# EAGLE board Dado-Ângelo Teresa 25441 (EAGLE 9.7.0)

Size 259.45 x 72.32 mm. Coordinates in mm from the lower left corner, seen from the top.
Outline: 0,0 259.45,0 259.45,72.32 0,72.32 0,0
Copper layers (1*16): Top 0.035mm / dielectric 1.5mm / Bottom 0.035mm
Design rules "default": minimum track width 6mil, minimum drill 0.35mm, track to track 6mil, track to pad 6mil, pad to pad 6mil, via to via 6mil, smd to smd 6mil, copper to edge 40mil, drill to drill 6mil, minimum pad ring 10mil, minimum via ring 8mil, stop-mask expansion 4mil, vias tented up to drill 0mil, thermal gap 10mil

## Footprints (pad centres in the part's own frame; a part is rotated, then mirrored left to right if it is on the bottom)
LEDRD254W60D565H860B = drill 0.981 pad 1.581: 1 -1.27,0; 2 1.27,0
7SEG-13 = drill 0.813 long: 1 -5.08,-7.62; 2 -2.54,-7.62; 3 0,-7.62; 4 2.54,-7.62; 5 5.08,-7.62; 6 5.08,7.62; 7 2.54,7.62; 8 0,7.62; 9 -2.54,7.62; 10 -5.08,7.62
BATTERY-GENERIC = drill 1.118 pad 3.15 octagon: + 2.54,0; - -2.54,0
RESAD1016W63L850D250B = drill 0.83 pad 1.43: 1 -5.08,0; 2 5.08,0
SWITCH-MOMENTARY-PTH-6.5MM = drill 1.016 pad 1.88: 1 -3.251,2.261; 2 3.251,2.261; 3 -3.251,-2.261; 4 3.251,-2.261
DIP762W53P254L1969H508Q14B = drill 0.743 pad 1.343: 1 -3.81,7.62; 2 -3.81,5.08; 3 -3.81,2.54; 4 -3.81,0; 5 -3.81,-2.54; 6 -3.81,-5.08; 7 -3.81,-7.62; 8 3.81,-7.62; 9 3.81,-5.08; 10 3.81,-2.54; 11 3.81,0; 12 3.81,2.54; 13 3.81,5.08; 14 3.81,7.62
DIP762W53P254L1969H508Q16B = drill 0.743 pad 1.343: 1 -3.81,8.89; 2 -3.81,6.35; 3 -3.81,3.81; 4 -3.81,1.27; 5 -3.81,-1.27; 6 -3.81,-3.81; 7 -3.81,-6.35; 8 -3.81,-8.89; 9 3.81,-8.89; 10 3.81,-6.35; 11 3.81,-3.81; 12 3.81,-1.27; 13 3.81,1.27; 14 3.81,3.81; 15 3.81,6.35; 16 3.81,8.89

## Placement (x,y rotation side)
D1  RED  [LEDRD254W60D565H860B]  33.29,63.45 180 top
DIGIT1  7SEG-CK  [7SEG-13]  176.8,53.29 0 top
FUNC1  FUNCTION-GENERATOR  [BATTERY-GENERIC]  35.47,8.26 0 top
P1  BATTERYGENERIC  [BATTERY-GENERIC]  8.26,43.99 180 top
R2  300  [RESAD1016W63L850D250B]  230.16,55.74 90 top
R3  300  [RESAD1016W63L850D250B]  250.48,40.5 0 top
R4  300  [RESAD1016W63L850D250B]  166.64,65.99 0 top
R5  300  [RESAD1016W63L850D250B]  186.96,65.99 0 top
R6  300  [RESAD1016W63L850D250B]  169.18,63.45 0 top
R7  300  [RESAD1016W63L850D250B]  184.42,63.45 0 top
R8  300  [RESAD1016W63L850D250B]  184.42,43.13 0 top
R9  300  [RESAD1016W63L850D250B]  169.18,43.13 0 top
R10  300  [RESAD1016W63L850D250B]  166.64,40.59 0 top
S1  SWITCH_MOMENTARY  [SWITCH-MOMENTARY-PTH-6.5MM]  214.92,44.31 90 top
U1  74HC10_PDIP  [DIP762W53P254L1969H508Q14B]  237.78,46.85 90 top
U2  74HC10_PDIP  [DIP762W53P254L1969H508Q14B]  100.6,54.56 90 top
U3  74HC73_PDIP  [DIP762W53P254L1969H508Q14B]  44.72,54.56 90 top
U4  CD4511_PDIP  [DIP762W53P254L1969H508Q16B]  129.81,54.56 90 top
U5  74HC73_PDIP  [DIP762W53P254L1969H508Q14B]  72.66,54.56 90 top

## Library data of the parts
D1 = Tinkercad; CATEGORY: Opto-Electronic; SUB-CATEGORY: LED; VALUE: LED_RED
DIGIT1 = Tinkercad; CATEGORY: Opto-Electronic; SUB-CATEGORY: Display; TYPE: 7-Segment
FUNC1 P1 R2-R10 S1 U1-U5 = Tinkercad

## Nets
DIGIT1_A: DIGIT1.7 R7.1
DIGIT1_B: DIGIT1.6 R5.1
DIGIT1_C: DIGIT1.4 R8.1
DIGIT1_D: DIGIT1.2 R9.2
DIGIT1_E: DIGIT1.1 R10.2
DIGIT1_F: DIGIT1.9 R6.2
DIGIT1_G: DIGIT1.10 R4.2
FUNC1+: FUNC1.+ S1.3 S1.4 U1.1 U1.2 U1.13
FUNC1-: D1.2 DIGIT1.3 FUNC1.- P1.- R3.2 S1.1 S1.2 U2.7 U3.11 U4.5 U4.8 U5.11
P1+: P1.+ R2.2 U2.14 U3.2 U3.3 U3.4 U3.14 U4.3 U4.4 U4.16 U5.4
U1_1Y: D1.1 U1.3 U1.12 U3.1 U3.5 U5.1
U1_2C: U1.5 U1.10
U1_2Y: U1.6 U1.9
U1_3C: U1.4 U1.11
U1_3Y: R3.1 U1.7 U1.8
U1_VCC: R2.1 U1.14
U2_1C: U2.1 U2.2 U2.8 U2.13
U2_1Y: U2.12 U5.3 U5.14
U2_3C: U2.3 U2.10 U2.11 U3.9 U4.1
U3_J2: U2.5 U2.9 U3.7 U3.10 U3.12 U4.7
U3_R2: U2.6 U3.6 U5.2
U4_A: R7.2 U4.13
U4_B: R5.2 U4.12
U4_C: R8.2 U4.11
U4_D: R9.1 U4.10
U4_E: R10.1 U4.9
U4_F: R6.1 U4.15
U4_G: R4.1 U4.14
U5_1Q: U2.4 U4.2 U5.12

## Tracks (layer width: path | path; a pad name or v marks a point on that pad's centre or on a via)
DIGIT1_A  (1 unrouted)
DIGIT1_B  (1 unrouted)
DIGIT1_C  (1 unrouted)
DIGIT1_D  (1 unrouted)
DIGIT1_E  (1 unrouted)
DIGIT1_F  (1 unrouted)
DIGIT1_G  (1 unrouted)
FUNC1+  (5 unrouted)
FUNC1-  (11 unrouted)
P1+  (10 unrouted)
U1_1Y  (5 unrouted)
U1_2C  (1 unrouted)
U1_2Y  (1 unrouted)
U1_3C  (1 unrouted)
U1_3Y  (2 unrouted)
U1_VCC  (1 unrouted)
U2_1C  (3 unrouted)
U2_1Y  (2 unrouted)
U2_3C  (4 unrouted)
U3_J2  (5 unrouted)
U3_R2  (2 unrouted)
U4_A  (1 unrouted)
U4_B  (1 unrouted)
U4_C  (1 unrouted)
U4_D  (1 unrouted)
U4_E  (1 unrouted)
U4_F  (1 unrouted)
U4_G  (1 unrouted)
U5_1Q  (2 unrouted)